# EAGLE board SM (EAGLE 5.11)

Size 100 x 80 mm. Coordinates in mm from the lower left corner, seen from the top.
Outline: 0,0 100,0 100,80 0,80 0,0
Copper layers (1*16): Top 0.035mm / dielectric 1.5mm / Bottom 0.035mm
Design rules "default": minimum track width 10mil, minimum drill 24mil, track to track 8mil, track to pad 8mil, pad to pad 8mil, via to via 8mil, smd to smd 8mil, copper to edge 40mil, drill to drill 8mil, minimum pad ring 10mil, minimum via ring 8mil, stop-mask expansion 4mil, vias tented up to drill 0mil, thermal gap 10mil

## Footprints (pad centres in the part's own frame; a part is rotated, then mirrored left to right if it is on the bottom)
C5B2,5 = drill 0.813 pad 1.778 square: 1 -2.54,0; 2 2.54,0
C7,5B4 = drill 0.914 pad 1.905 square: 1 -3.81,0; 2 3.81,0
FOX-BOARD = drill 0.8 pad 1.5 square: J6-1 31.75,22.86; J6-2 34.29,22.86; J6-3 31.75,20.32; J6-4 34.29,20.32; J6-5 31.75,17.78; J6-6 34.29,17.78; J6-7 31.75,15.24; J6-8 34.29,15.24; J6-9 31.75,12.7; J6-10 34.29,12.7; J6-11 31.75,10.16; J6-12 34.29,10.16; J6-13 31.75,7.62; J6-14 34.29,7.62; J6-15 31.75,5.08; J6-16 34.29,5.08; J6-17 31.75,2.54; J6-18 34.29,2.54; J6-19 31.75,0; J6-20 34.29,0; J6-21 31.75,-2.54; J6-22 34.29,-2.54; J6-23 31.75,-5.08; J6-24 34.29,-5.08; J6-25 31.75,-7.62; J6-26 34.29,-7.62; J6-27 31.75,-10.16; J6-28 34.29,-10.16; J6-29 31.75,-12.7; J6-30 34.29,-12.7; J6-31 31.75,-15.24; J6-32 34.29,-15.24; J6-33 31.75,-17.78; J6-34 34.29,-17.78; J6-35 31.75,-20.32; J6-36 34.29,-20.32; J6-37 31.75,-22.86; J6-38 34.29,-22.86; J6-39 31.75,-25.4; J6-40 34.29,-25.4; J7-1 -34.29,22.86; J7-2 -31.75,22.86; J7-3 -34.29,20.32; J7-4 -31.75,20.32; J7-5 -34.29,17.78; J7-6 -31.75,17.78; J7-7 -34.29,15.24; J7-8 -31.75,15.24; J7-9 -34.29,12.7; J7-10 -31.75,12.7; J7-11 -34.29,10.16; J7-12 -31.75,10.16; J7-13 -34.29,7.62; J7-14 -31.75,7.62; J7-15 -34.29,5.08; J7-16 -31.75,5.08; J7-17 -34.29,2.54; J7-18 -31.75,2.54; J7-19 -34.29,0; J7-20 -31.75,0; J7-21 -34.29,-2.54; J7-22 -31.75,-2.54; J7-23 -34.29,-5.08; J7-24 -31.75,-5.08; J7-25 -34.29,-7.62; J7-26 -31.75,-7.62; J7-27 -34.29,-10.16; J7-28 -31.75,-10.16; J7-29 -34.29,-12.7; J7-30 -31.75,-12.7; J7-31 -34.29,-15.24; J7-32 -31.75,-15.24; J7-33 -34.29,-17.78; J7-34 -31.75,-17.78; J7-35 -34.29,-20.32; J7-36 -31.75,-20.32; J7-37 -34.29,-22.86; J7-38 -31.75,-22.86; J7-39 -34.29,-25.4; J7-40 -31.75,-25.4
DIL16 = drill 0.813 pad 1.778 square: 1 -8.89,-3.81; 2 -6.35,-3.81; 3 -3.81,-3.81; 4 -1.27,-3.81; 5 1.27,-3.81; 6 3.81,-3.81; 7 6.35,-3.81; 8 8.89,-3.81; 9 8.89,3.81; 10 6.35,3.81; 11 3.81,3.81; 12 1.27,3.81; 13 -1.27,3.81; 14 -3.81,3.81; 15 -6.35,3.81; 16 -8.89,3.81
DIL08 = drill 0.813 long: 1 -3.81,-3.81; 2 -1.27,-3.81; 3 1.27,-3.81; 4 3.81,-3.81; 5 3.81,3.81; 6 1.27,3.81; 7 -1.27,3.81; 8 -3.81,3.81
DIL14/7 = drill 0.813 pad 1.6 octagon: 1 -7.62,-3.81; 2 -5.08,-3.81; 5 2.54,-3.81; 6 5.08,-3.81; 7 7.62,-3.81; 8 7.62,3.81; 14 -7.62,3.81
0309/12 = drill 0.813 octagon: 1 -6.35,0; 2 6.35,0
SP19L = drill 1.016 long: A 5.715,-1.27; E -6.985,-1.27; S -1.905,1.27

## Placement (x,y rotation side)
C1  4.7nF  [C5B2,5]  72.39,27.94 0 top
C2  100nF  [C7,5B4]  38.1,15.24 0 top
C3  100nF  [C7,5B4]  38.1,8.89 0 top
C4  100pF  [C5B2,5]  72.39,39.37 0 top
C5  100pF  [C5B2,5]  72.39,33.02 0 top
C6  100nF  [C7,5B4]  72.39,22.86 0 top
FOXBOARD-1  FOX-BOARD  [FOX-BOARD]  52.07,40.64 0 top
IC1  [DIL16]  38.1,36.83 90 top
IC2  AD712N  [DIL08]  41.91,62.23 270 top
IC3  MAX291  [DIL08]  50.8,16.51 0 top
IC4  DCP0105P  [DIL14/7]  64.77,62.23 0 top
R1  100k  [0309/12]  39.37,50.8 180 top
R2  120k  [0309/12]  26.67,35.56 90 top
R3  4.7k  [0309/12]  27.94,20.32 90 top
R4  10k  [0309/12]  55.88,53.34 0 top
R5  10k  [0309/12]  72.39,53.34 0 top
R6  56k  [0309/12]  67.31,44.45 0 top
R7  1.2k  [0309/12]  58.42,34.29 0 top
R8  [SP19L]  27.94,58.42 270 top

## Library data of the parts
C1-C6 = CAP
FOXBOARD-1 = Julien
IC1 = 40XX
IC2 = analog-devices; MF: ALTERA CORPORATION; MPN: AD712JNZ; OC_FARNELL: 9604898; OC_NEWARK: 59K4554
IC3 = maxim; MPN: MAX291CPA+; OC_FARNELL: unknown; OC_NEWARK: 67K4526
IC4 = burr-brown; MPN: DCP010512BP-U; OC_FARNELL: 1461015; OC_NEWARK: 61M5777
R1-R7 = rcl
R8 = pot

## Nets
0V: IC4.2 IC4.5
+3.3V-2: FOXBOARD-1.J6-2
+3.3V-3: FOXBOARD-1.J7-39
+3.3V-4: FOXBOARD-1.J7-40
+3V3: FOXBOARD-1.J6-1
+5V: C3.2 FOXBOARD-1.J7-29 IC1.16 IC3.7 R4.2
+5V-2: FOXBOARD-1.J6-12
+12V: IC2.8
+VOUT: IC4.6
-12V: IC2.4
BOUCLE: IC3.3 IC3.4
FILTRE_OUT: C6.1 IC2.3 R6.2
FOX_MOD: FOXBOARD-1.J6-9 IC1.9
GND: C2.1 C3.1 C4.2 C5.2 FOXBOARD-1.J6-40 IC1.5 IC1.8 IC3.2 R1.1 R3.1 R5.2 R6.1 R7.1
GND1: FOXBOARD-1.J7-1
GND2: FOXBOARD-1.J7-2
GND3: FOXBOARD-1.J6-39
MOD_OUT: IC1.4 IC3.8
N$1: C1.2 IC1.6
N$2: C1.1 IC1.7
N$3: IC1.12 R1.2
N$4: IC1.11 R2.2
N$5: R2.1 R3.2
N$6: C6.2 IC3.5
N$7: C2.2 IC3.6 R4.1 R5.1
N$8: FOXBOARD-1.J6-8
N$9: C4.1 C5.1 IC3.1
N$10: IC2.2 R7.2 R8.E
N$11: IC2.1 R8.S
VS: IC4.1

## Tracks (layer width: path | path; a pad name or v marks a point on that pad's centre or on a via)
0V  (1 unrouted)
+5V  (4 unrouted)
BOUCLE  (1 unrouted)
FILTRE_OUT  (2 unrouted)
FOX_MOD  (1 unrouted)
GND  (12 unrouted)
MOD_OUT  (1 unrouted)
N$1  (1 unrouted)
N$2  (1 unrouted)
N$3  (1 unrouted)
N$4  (1 unrouted)
N$5  (1 unrouted)
N$6  (1 unrouted)
N$7  (3 unrouted)
N$9  (2 unrouted)
N$10  (2 unrouted)
N$11  (1 unrouted)